# Altium PCB MCB3.PcbDoc
Units mil, origin at the board's own origin, x right, y up, seen from the top; angles counter-clockwise.
Board outline 1285 x 792.2 mil, 2 copper layers (Top Layer, Bottom Layer); 43 components, 55 nets, 215 pads, 39 vias.
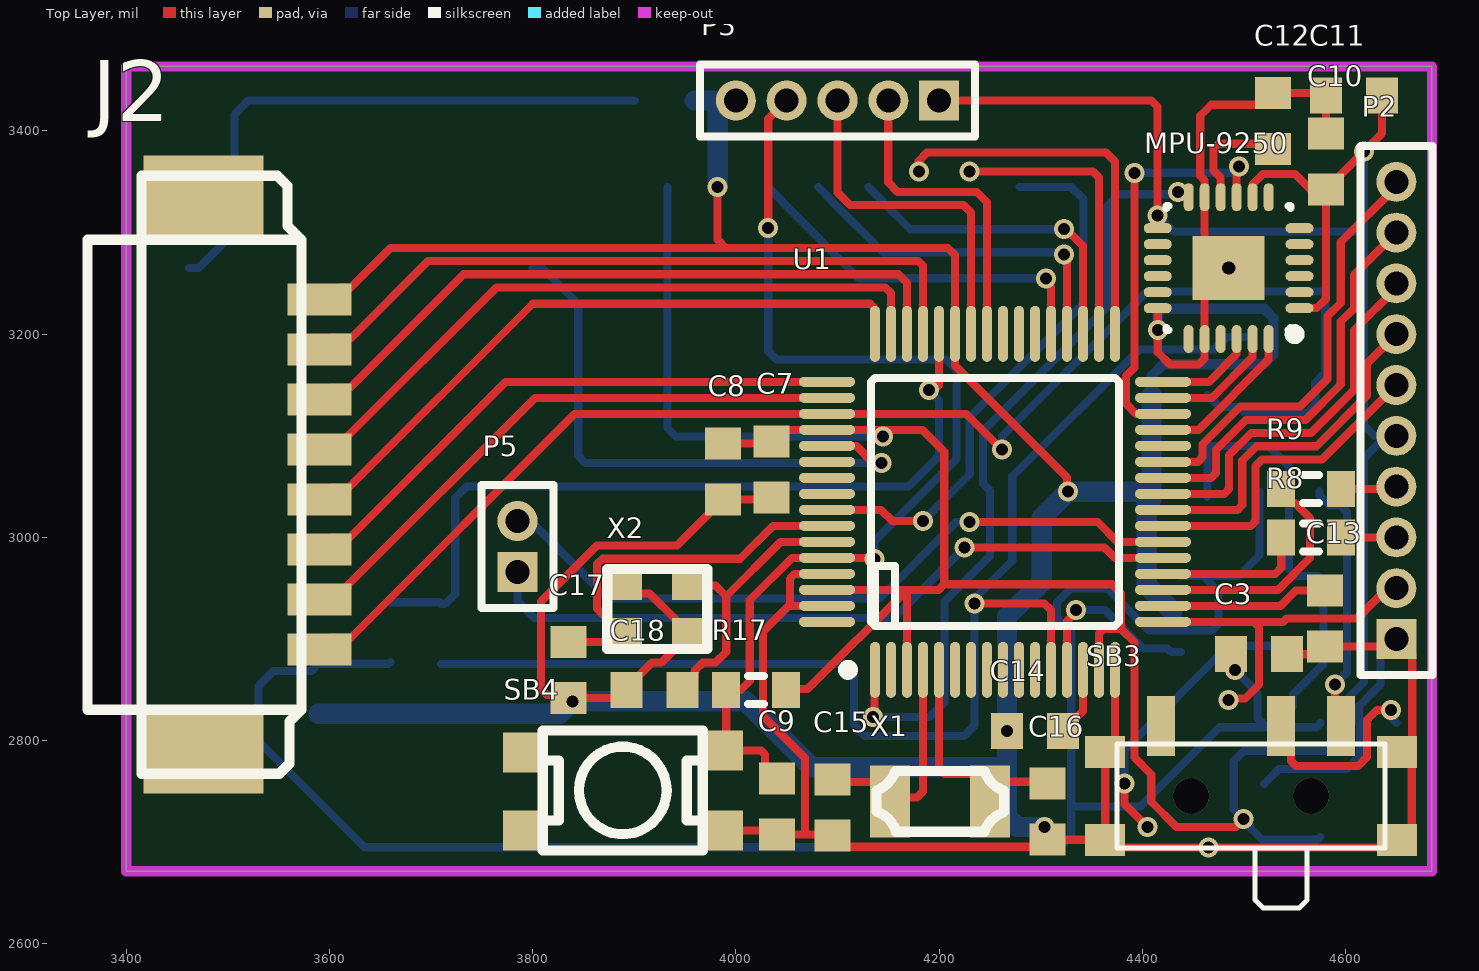
[diagram p0: Top Layer view]
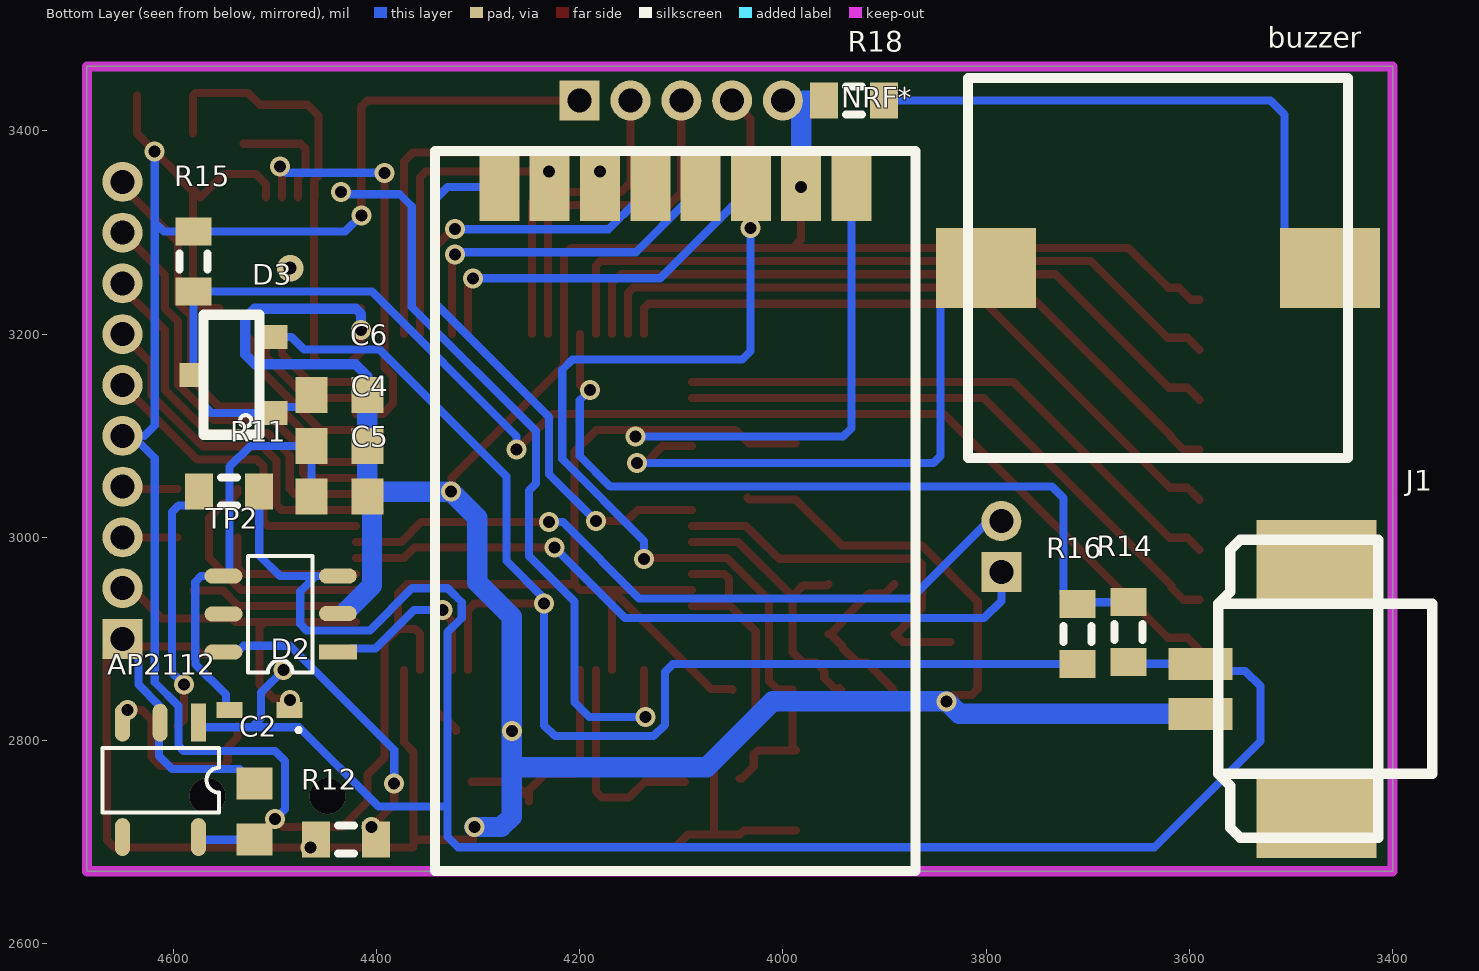
[diagram p1: Bottom Layer view, seen from below]

## Layer stack, top to bottom
Top Solder: solder mask 0.4, Solder Resist, Dk 3.5
Top Layer: signal copper 1.4
Dielectric 1: dielectric 12.6, FR-4, Dk 4.8
Bottom Layer: signal copper 1.4
Bottom Solder: solder mask 0.4, Solder Resist, Dk 3.5

## Board outline
3400,2671.38 3400,3463.58 4685,3463.58 4685,2671.38

## Design rules (kind name [scope] priority, off if disabled: settings)
Clearance [All] p1: gap=5 ignorepadtopadclearanceinfootprint=FALSE
PolygonConnect [All] p1: connectstyle=Relief reliefconductorwidth=10 reliefentries=4 polygonreliefangle="90 Angle" airgapwidth=10
RoutingVias [All] p1: holewidth=28 width=50 viastyle="Through Hole" minholewidth=11.81 minwidth=0 maxholewidth=40 maxwidth=50
SolderMaskExpansion [All] p1: expansion=4
Width [All] p1: maxlimit=40 minlimit=7 preferedwidth=10
30 further rules are at their usual default settings.

## Components (designator, comment, footprint, x,y, rotation, side; value= is the part's Value field where it differs from the comment)
AP2112 "AP2112" SOT-23-5 4555.12,2792.8 r270 bottom
buzzer "Buzzer" HN9650B-3 3816.14,3081.34 r90 bottom
C2 "Cap Semi" 1608[0603] 4520,2730 r270 bottom value=100pF
C3 "Cap Semi" 1608[0603] 4515,2885 r180 top value=100pF
C4 "Cap Semi" 1608[0603] 4436.59,3090 r0 bottom value=100pF
C5 "Cap Semi" 1608[0603] 4436.59,3040 r0 bottom value=100pF
C6 "Cap Semi" 1608[0603] 4436.59,3140 r0 bottom value=100pF
C7 "Cap Semi" 1608[0603] 4035,3066.61 r90 top value=100pF
C8 "Cap Semi" 1608[0603] 3987.44,3065 r90 top value=100pF
C9 "Cap Semi" 1608[0603] 4040.47,2735 r90 top value=100pF
C10 "Cap Semi" 1608[0603] 4580.76,3370 r270 top value=100pF
C11 "Cap Semi" 1608[0603] 4608.31,3435 r0 top value=100pF
C12 "Cap Semi" 1608[0603] 4528.46,3410 r270 top value=100pF
C13 "Cap Semi" 1608[0603] 4580,2920 r90 top value=100pF
C14 "Cap Semi" 1608[0603] 4294.37,2809.47 r0 top value=100pF
C15 "Cap Semi" 1608[0603] 4095,2734.33 r270 top value=100pF
C16 "Cap Semi" 1608[0603] 4306.57,2730 r270 top value=100pF
C17 "Cap Semi" 1608[0603] 3835,2869.29 r270 top value=100pF
C18 "Cap Semi" 1608[0603] 3920,2850 r180 top value=100pF
D2 "Schottky" SOD-523 4515,2830 r0 bottom
D3 "Vref" SOT-23 4580,3160 r90 bottom
J1 "Plug2" Terminal_block_2pin_1.25mm_SMD 3475,2850 r270 bottom
J2 "Plug8" Terminal_block_8pin_1.25mm_SMD 3475.83,2915.02 r90 top
MPU-9250 "24Pin" QFN_24PIN 4485,3265 r180 top
NRF* "NRF24L01" NRF24L01_Module_SMD 3869.54,2671.77 r0 bottom
P2 "MHDR1X10" MHDR1X10 4650,2900 r90 top
P3 "MHDR1X5" MHDR1X5 4200,3430 r180 top
P5 "MHDR1X2" MHDR1X2 3785,2966.06 r90 top
R8 "Res3" J1-0603 4566.22,3000 r0 top value=1K
R9 "Res3" J1-0603 4566.22,3047.56 r0 top value=1K
R11 "Res3" J1-0603 4545,3045 r0 bottom value=1K
R12 "Res3" J1-0603 4430,2702.44 r180 bottom value=1K
R14 "Res3" J1-0603 3660,2906.68 r270 bottom value=1K
R15 "Res3" J1-0603 4580,3271.46 r90 bottom value=1K
R16 "Res3" J1-0603 3710,2905 r90 bottom value=1K
R17 "Res3" J1-0603 4020,2850 r180 top value=1K
R18 "Res3" J1-0603 3930,3430 r180 bottom value=1K
SB3 "SPDT" SS-SK-02P 4505,2745 r0 top
SB4 "SPST" "TACK-SW_SMD 2P 4x3mm_2" 3967.44,2810 r270 top
TP2 "TP-4057" SOT-23-6 4462.91,2867.13 r0 bottom
U1 "NUC240SE3AE" MCU_LQFP_64_7x7 4255,3035 r90 top
X1 "Xtal" FC-135 4187.4,2673.07 r0 top value=32.768k
X2 "Xtal" 2520S 3890.04,2954.21 r0 top value=12M

## Footprints (in the part's own frame and the unit in brackets; to place one, negate y for a bottom-side part, rotate by r counter-clockwise, add the part's x,y. Pads: shape width x height; smd on the part's side, far side on the other; paste and mask are expansions set on the pad)
1608[0603] [mm] "Chip Capacitor, Body 1.6x0.8mm, IPC High Density"
  rect 0.8x0.9 smd: 1(-0.7,0) 2(0.7,0)
  body extent -0.87,-0.48 0.87,0.48, height 1.3
2520S [mm]
  rect 0.9x0.8 smd: 1(0,-1.25) 2(1.65,0) ""(0,0) ""(1.65,-1.25)
  silkscreen extent -0.43,-1.63 2.07,0.37
FC-135 [mm]
  rect 1x1.8 smd: 1(-0.91,1.7) 2(1.59,1.7)
  silkscreen extent -1.24,0.94 1.94,2.46
HN9650B-3 [mm]
  rect 2x2.5 smd: 1(4.665,-0.41) 2(4.665,-9.005)
  silkscreen extent -0.08,-9.46 9.42,0.04
J1-0603 [mm] "Chip Resistor, Body 1.6x0.8mm, IPC High Density"
  rect 0.7x0.9 smd: 1(-0.75,0) 2(0.75,0)
  silkscreen extent -0.2,-0.35 0.2,0.35, body extent -0.85,-0.48 0.85,0.48, height 0.9
MCU_LQFP_64_7x7 [mm]
  oval 1.4x0.25 smd: 1(-4.2,3) 2(-4.2,2.6) 3(-4.2,2.2) 4(-4.2,1.8) 5(-4.2,1.4) 6(-4.2,1) 7(-4.2,0.6) 8(-4.2,0.2) 9(-4.2,-0.2) 10(-4.2,-0.6) 11(-4.2,-1) 12(-4.2,-1.4) 13(-4.2,-1.8) 14(-4.2,-2.2) 15(-4.2,-2.6) 16(-4.2,-3) 33(4.2,-3) 34(4.2,-2.6) 35(4.2,-2.2) 36(4.2,-1.8) 37(4.2,-1.4) 38(4.2,-1) 39(4.2,-0.6) 40(4.2,-0.2) 41(4.2,0.2) 42(4.2,0.6) 43(4.2,1) 44(4.2,1.4) 45(4.2,1.8) 46(4.2,2.2) 47(4.2,2.6) 48(4.2,3)
  oval 0.25x1.4 smd: 17(-3,-4.2) 18(-2.6,-4.2) 19(-2.2,-4.2) 20(-1.8,-4.2) 21(-1.4,-4.2) 22(-1,-4.2) 23(-0.6,-4.2) 24(-0.2,-4.2) 25(0.2,-4.2) 26(0.6,-4.2) 27(1,-4.2) 28(1.4,-4.2) 29(1.8,-4.2) 30(2.2,-4.2) 31(2.6,-4.2) 32(3,-4.2) 49(3,4.2) 50(2.6,4.2) 51(2.2,4.2) 52(1.8,4.2) 53(1.4,4.2) 54(1,4.2) 55(0.6,4.2) 56(0.2,4.2) 57(-0.2,4.2) 58(-0.6,4.2) 59(-1,4.2) 60(-1.4,4.2) 61(-1.8,4.2) 62(-2.2,4.2) 63(-2.6,4.2) 64(-3,4.2)
  silkscreen extent -4.32,-3.1 3.1,3.8, body extent -3.5,-3.5 3.5,3.5, height 1.6
MHDR1X2 [mm] "Connector; Header; 2 Position"
  rect 1x1 hole 0.6: 1(0,0)
  round 1 hole 0.6: 2(1.27,0)
  silkscreen extent -0.9,-0.9 2.17,0.9
MHDR1X5 [mm] "Connector; Header; 5 Position"
  rect 1x1 hole 0.6: 1(0,0)
  round 1 hole 0.6: 2(1.27,0) 3(2.54,0) 4(3.81,0) 5(5.08,0)
  silkscreen extent -0.9,-0.9 5.98,0.9
MHDR1X10 [mm] "Connector; Header; 10 Position"
  rect 1x1 hole 0.6: 1(0,0)
  round 1 hole 0.6: 2(1.27,0) 3(2.54,0) 4(3.81,0) 5(5.08,0) 6(6.35,0) 7(7.62,0) 8(8.89,0) 9(10.16,0) 10(11.43,0)
  silkscreen extent -0.9,-0.9 12.33,0.9
NRF24L01_Module_SMD [mm]
  rect 1x1.7 smd: 1(1.6,-17.1) 2(2.857,-17.1) 3(4.114,-17.1) 4(5.371,-17.1) 5(6.629,-17.1) 6(7.886,-17.1) 7(9.143,-17.1) 8(10.4,-17.1)
  silkscreen extent 0,-18 12.02,0
QFN_24PIN [mm]
  oval 0.7x0.249 smd: 1(-1.772,1) 2(-1.772,0.6) 3(-1.772,0.2) 4(-1.772,-0.2) 5(-1.772,-0.6) 6(-1.772,-1) 13(1.772,-1) 14(1.772,-0.6) 15(1.772,-0.2) 16(1.772,0.2) 17(1.772,0.6) 18(1.772,1)
  oval 0.249x0.7 smd: 7(-1,-1.772) 8(-0.6,-1.772) 9(-0.2,-1.772) 10(0.2,-1.772) 11(0.6,-1.772) 12(1,-1.772) 19(1,1.772) 20(0.6,1.772) 21(0.2,1.772) 22(-0.2,1.772) 23(-0.6,1.772) 24(-1,1.772)
  rect 1.8x1.6 smd: 25(0,0)
  silkscreen extent -1.77,-1.55 1.55,1.78, body extent -1.55,-1.55 1.55,1.55, height 1
SOD-523 [mm] "SODFL, 2-Leads, Body 0.80x1.60mm, IPC Medium Density"
  rect 0.65x0.4 smd: 1(-0.75,0) 2(0.75,0)
  silkscreen extent -1.02,0.45 -0.93,0.55, body extent -0.65,-0.45 0.65,0.45, height 0.65
SOT-23 [mm]
  rect 0.6x0.7 smd: 1(-0.95,-2) 2(0,0) 3(0.95,-2)
  silkscreen extent -1.5,-1.65 1.5,-0.25
SOT-23-5 [mm]
  rect 0.95x0.38 smd: 1(-0.63,-0.51)
  oval 0.95x0.38 smd: 2(-0.63,-1.47) 3(-0.63,-2.41) 4(2.23,-2.41) 5(2.23,-0.51)
  silkscreen extent 0,-2.91 1.61,0
SOT-23-6 [mm]
  rect 0.95x0.38 smd: 1(-0.63,-0.51)
  oval 0.95x0.38 smd: 2(-0.63,-1.47) 3(-0.63,-2.41) 4(2.23,-2.41) 5(2.227,-1.461) 6(2.23,-0.51)
  silkscreen extent 0,-2.91 1.61,0
SS-SK-02P [mm]
  rect 0.7x1.5 smd: 1(-2.195,1.76) 2(0.805,1.76) 3(2.305,1.76)
  rect 1x0.8 smd: ""(-3.595,-1.09) ""(-3.595,1.11) ""(3.705,-1.09) ""(3.705,1.11)
  silkscreen extent -3.29,-2.79 3.41,1.31
"TACK-SW_SMD 2P 4x3mm_2" [mm]
  rect 1x1 smd: 1(0.5,0.5) 1(0.55,-4.5) 2(2.5,0.5) 2(2.5,-4.5)
  silkscreen extent 0,-4 3,0
Terminal_block_2pin_1.25mm_SMD [mm]
  rect 0.8x1.6 smd: 1(-0.65,-2.9) 2(0.6,-2.9)
  rect 2.1x3 smd: ""(-3.2,0) ""(3.15,0)
  silkscreen extent -3.75,-2.45 3.7,2.9
Terminal_block_8pin_1.25mm_SMD [mm]
  rect 0.8x1.6 smd: 1(-0.65,-2.9) 2(0.6,-2.9) 3(1.85,-2.9) 4(3.1,-2.9) 5(4.35,-2.9) 6(5.6,-2.9) 7(6.85,-2.9) 8(8.1,-2.9)
  rect 2.1x3 smd: ""(-3.2,0) ""(10.65,0)
  silkscreen extent -3.75,-2.45 11.2,2.9

## Part data
C2 C3 C4 C5 C6 C7 C8 C9 C10 C11 C12 C13 C14 C15 C16 C17 C18: "Capacitor (Semiconductor SIM Model)", LatestRevisionDate=29-May-2009, LatestRevisionNote="IPC-7351 Footprint Added.", PackageDescription="Chip Capacitor", PackageReference=C1206, Published=8-Jun-2000, Publisher="Altium Limited"
D2: library part Diode2
MPU-9250: library part MPU-9250_2
NRF*: library part NRF24L01_module
P2: "Header, 10-Pin", LatestRevisionDate=17-Jul-2002, LatestRevisionNote="Re-released for DXP Platform.", Publisher="Altium Limited"
P3: "Header, 5-Pin", LatestRevisionDate=17-Jul-2002, LatestRevisionNote="Re-released for DXP Platform.", Publisher="Altium Limited"
P5: "Header, 2-Pin", LatestRevisionDate=17-Jul-2002, LatestRevisionNote="Re-released for DXP Platform.", Publisher="Altium Limited"
R8 R9 R11 R12 R14 R15 R16 R17 R18: "Resistor", LatestRevisionDate=29-May-2009, LatestRevisionNote="IPC-7351 Footprint Added.", PackageDescription="Chip Resistor", PackageReference=J1-0603, Published=8-Jun-2000, Publisher="Altium Limited"
SB3: library part Switch_Button2
SB4: library part Switch_Button1
U1: OriginalSymbolOrigin=(0,0)

## Via types
v1: diameter 19.68, hole 11.81, Top Layer to Bottom Layer, tented both sides, 36 vias
v2: diameter 35.43, hole 35.43, Top Layer to Bottom Layer, 2 vias
v3: diameter 25.98, hole 12.99, Top Layer to Bottom Layer, tented top, 1 vias

## Nets (pads, with @x,y where several pads share a name; then routed paths per layer and width w, separated by ;. In a path a pad name is that pad's centre, name@x,y a point inside that pad or via, vN(x,y) a via of type N, cw(c..) or ccw(c..) an arc to the next point about the centre after c; other vN are vias at no path point)
ADC0: R14.1 R16.2 U1.44 | length 787.6
  Top Layer w8: v1(4190,3145) 4194.76,3145 4199.88,3150.12 U1.44
  Bottom Layer w8: R14.1 3708.32,2936.21 R16.2 3713.94,2934.53 3723.72,2944.31 3723.72,3038.72 3735,3050 4170,3050 4200,3080 4200,3135 v1(4190,3145)
ADC1: J2.7 U1.45 | length 699.2
  Top Layer w8: J2.7 3601.75,3196.46 3621.46,3196.46 3697,3272 4179.45,3272 4184.13,3267.31 U1.45
ADC2: J2.6 U1.46 | length 683.3
  Top Layer w8: J2.6 3601.75,3147.24 3619.99,3147.24 3731.75,3259 4160,3259 4168.39,3250.61 U1.46
ADC3: J2.5 U1.47 | length 671.8
  Top Layer w8: J2.5 3605.75,3086.28 3617.5,3098.03 3617.5,3099.11 3764.39,3246 4147,3246 4152.64,3240.36 U1.47
ADC4: J2.4 U1.48 | length 653.7
  Top Layer w8: J2.4 3601.75,3048.82 3618.82,3048.82 3800,3230 4132.2,3230 4136.54,3225.67 4136.54,3200.71 U1.48
ADC5: J2.3 U1.49 | length 568.1
  Top Layer w8: J2.3 3601.75,2999.61 3619.61,2999.61 3773.11,3153.11 U1.49
ADC6: J2.2 U1.50 | length 583.2
  Top Layer w8: J2.2 3605.75,2938.65 3617.5,2950.39 3617.5,2952.5 3802.36,3137.36 U1.50
ADC_ONOFF: D3.3 R16.1 U1.12 | length 1272.5
  Top Layer w8: v1(4235,2935) 4303.5,2935 4310.12,2928.39 U1.12
  Bottom Layer w8: R16.1 4108.37,2875.47 4116.16,2867.68 4116.16,2815.38 4127.2,2804.34 4224.34,2804.34 4235,2815 v1(4235,2935) 4235,2940 4272,2977 4272,3059.85 4397.21,3185.07 4471.21,3185.07 4483.55,3197.4 D3.3
AVDD: AP2112.5 C2.2 C7.2 C8.2 C10.2 C11.2 MPU-9250.1 MPU-9250.8 MPU-9250.13 NRF*.1 P2.5 P3.1 R15.2 R17.1 U1.3 U1.15 U1.52 U1.62 | length 3521.9
  Top Layer w8: C8.2@3994.09,3099.2 C8.2 4033.39,3092.56 C7.2 4046.69,3105.87 U1.52 4183.5,3105.87 4205,3084.37 4205,2953.84 ; R17.1 4050.15,2850.62 4070.62,2850.62 4168.39,2948.39 ; U1.62 4168.39,2948.39 ; U1.3 4168.39,2948.39 ; P3.1 4408.84,3430 4415,3423.84 v1(4415,3316.87) ; U1.15 4357.36,2905.31 4362.05,2910 4378.91,2910 ; v1(4499.78,2722.66) 4492.13,2715 4433.68,2715 4408.84,2739.83 4408.84,2766.51 4392.15,2783.2 4392.15,2896.76 4378.91,2910 ; MPU-9250.8 4508.62,3347.57 4518.61,3357.56 4550.32,3357.56 4573.1,3334.78 C10.2 ; MPU-9250.1 4571.71,3225.63 4580.76,3234.68 C10.2 ; C11.2 4635.87,3397.56 v1(4618.32,3380) 4594.47,3356.16 4594.47,3354.19 4582.72,3342.44 C10.2 ; 4168.39,2948.39 4199.54,2948.39 4205,2953.84 ; 4205,2953.84 4370.07,2953.84 4378.91,2945 4378.91,2910
  Bottom Layer w8: NRF*.1 3932.53,3107.47 3940.8,3099.2 v1(4145,3099.2) ; v1(4415,3316.87) 4430.88,3300.98 R15.2 4609.3,3300.98 4618.32,3310 ; AP2112.5 4572.64,2702.44 C2.2 4518.03,2702.44 4506.28,2714.19 4506.28,2716.16 v1(4499.78,2722.66) 4490,2732.44 4490,2780 4499.9,2789.9 4589.9,2789.9 4595,2795 4595,2834.13 4618.32,2857.45 4618.32,3078.32 P2.5@4640,3100 ; v1(4618.32,3380) 4618.32,3310 ; P2.5 P2.5@4640,3100 ; 4618.32,3310 4618.32,3110 4628.32,3100 P2.5@4640,3100
button: P2.10 U1.27 | length 425.3
  Top Layer w8: U1.27 4454.69,3074.37 4459.38,3079.06 4459.38,3091.67 4496.43,3128.72 4555.18,3128.72 4582.31,3155.85 4582.31,3217.85 4595.31,3230.85 4595.31,3290.87 4650,3345.55 P2.10
buzzer: buzzer.1 U1.53 | length 570.9
  Top Layer w8: U1.53 4090,3089.77 4118.59,3089.77 4134.97,3073.38 v1(4143.38,3073.38)
  Bottom Layer w8: buzzer.1 3809.41,3265 3844.78,3229.63 3844.78,3080.22 3851.62,3073.38 v1(4143.38,3073.38)
CHRG: TP2.1 U1.13 | length 182.7
  Top Layer w8: U1.13 4325.87,2917.86 4334.95,2926.94 v1(4334.95,2928.39)
  Bottom Layer w8: v1(4334.95,2928.39) 4363.23,2928.39 4400.93,2890.68 4424.53,2890.68 4428.01,2887.2 TP2.1
D12I: C18.1 U1.59 X2.2 | length 281.4
  Top Layer w8: C18.1@3942.56,2849.88 C18.1@3944.21,2851.54 ; C18.1 3959.31,2861.75 3959.31,2867.71 3960,2868.4 3960,2869.29 3967.42,2876.72 3980,2876.72 3990.47,2887.19 3990.47,2942.09 ; X2.2 3956.68,2952.53 3980.03,2952.53 3990.47,2942.09 ; U1.59 4044.02,2995.63 3990.47,2942.09
D12O: C17.1 U1.58 X2.1 | length 381.3
  Top Layer w8: C17.1 3881.89,2896.85 X2.1 3888.07,2905 3863.32,2929.75 3863.32,2973.69 3868.59,2978.96 4003.96,2978.96 4036.38,3011.38 U1.58
D+: R8.1 U1.20 | length 148.8
  Top Layer w8: U1.20 4530.83,2964.13 4536.69,2970 R8.1
D-: R9.1 U1.19 | length 239.4
  Top Layer w8: U1.19 4533.46,2948.39 4565,2979.92 4565,3019.25 4550.41,3033.84 4546.47,3033.84 4536.69,3043.62 R9.1
DVBUS: D2.1 P2.2 U1.17 | length 343.5
  Top Layer w8: U1.17 4510,2916.89 ; v1(4485,2840) 4486.35,2841.35 4501.35,2841.35 4515,2855 4515,2911.89 4510,2916.89 ; P2.2 4641.31,2950 4611.31,2920 4541.85,2920 4538.74,2916.89 4510,2916.89
GND: AP2112.2 C2.1 C3.1 C4.1 C5.1 C6.1 C7.1 C8.1 C9.1 C10.1 C11.1 C12.1 C13.1 C14.1 C15.2 C16.2 C17.2 C18.2 J1.2 J2.8 MPU-9250.11 MPU-9250.18 MPU-9250.20 MPU-9250.25 NRF*.2 P2.1 P3.5 R12.1 R18.1 SB3. SB4.2@3987.13,2711.57 TP2.2 U1.16 U1.43 U1.61 U1.63 X2. | length 5734.3
  Top Layer w8: J2.8 3598.25,3233.92 3610,3245.67 3620.67,3245.67 3660,3285 3990.03,3285 ; C17.2@3831.73,2845 3814.16,2845 3808.28,2850.87 3808.28,2937.03 3863.21,2991.96 3941.96,2991.96 C8.1 4033.39,3037.44 C7.1 ; C17.2 3884.18,2841.73 C18.2 3892.44,2851.69 3917.47,2876.72 3926.72,2876.72 3941.28,2891.28 3941.28,2893.25 X2.@3953.03,2905 ; X2.@3890.04,2954.21 3899.32,2944.93 3915.07,2944.93 3941.28,2918.72 3941.28,2916.75 X2.@3953.03,2905 ; X2.@3955,2905 X2.@3953.03,2905 ; v1(3982.02,3345) 3982.02,3293.01 3990.03,3285 ; SB4.2@3987.13,2711.57 4038.31,2711.57 4042.44,2707.44 4067.99,2707.44 ; U1.63 4051.87,2932.64 ; U1.61 4057.77,2964.13 4053.09,2959.45 4053.09,2933.86 4051.87,2932.64 ; v1(4326.67,3045) 4325.89,3045.78 4325.89,3059.11 4215.63,3169.37 U1.43 4215.63,3277.84 4208.47,3285 3990.03,3285 ; U1.16 4373.11,2798.35 4363.46,2788.7 4363.46,2702.8 SB3.@4363.11,2702.44 ; MPU-9250.18 v1(4415.22,3203.91) 4415.22,3182.18 4427.4,3170 4455.31,3170 4461.38,3176.06 MPU-9250.20 MPU-9250.11 4461.29,3334.87 4461.29,3351.48 4457,3355.77 4457,3415 4467.81,3425.81 4514.75,3425.81 4526.5,3437.56 C12.1 4578.2,3437.56 C11.1 C10.1 ; C3.1 4572.56,2885 C13.1 4642.44,2892.44 P2.1 4665.69,2884.31 4665.69,2799.58 4665.2,2799.1 4665.2,2702.09 4658.02,2694.92 4364.1,2694.92 4363.37,2700.44 4363.16,2702.05 SB3.@4363.11,2702.44 ; 4051.87,2932.64 4026.67,2907.44 4026.67,2824.3 4067.99,2782.98 4067.99,2707.44 ; 4067.99,2707.44 4093.54,2707.44 4105.42,2695.57 4305.32,2695.57 4305.32,2703.7 C16.2 SB3.@4363.11,2702.44
  Bottom Layer w8: C5.1@4397.28,3026.28 C5.1@4404.41,3033.41 ; C2.1 4534.55,2772.11 4601.29,2772.11 4614.18,2785 4614.18,2816.41 AP2112.2 4612.99,2833.74 4634.31,2855.06 4634.31,2884.31 P2.1
  Bottom Layer w10: C6.1 4409.03,3158.81 4420.61,3170.39 4519.57,3170.39 4529.19,3180.01 4529.19,3215.81 4520,3225 4420.22,3225 4415.22,3220 v1(4415.22,3203.91)
  Bottom Layer w20: J1.2 3826.64,2826.38 v1(3838.94,2838.68) 4009.93,2838.68 4074.85,2773.75 4266.81,2773.75 ; R18.1 3979.76,3430 3982.02,3427.74 v1(3982.02,3345) ; v1(4303.65,2715) 4277,2715 4266.81,2725.19 4266.81,2773.75 ; C5.1@4404.41,3033.41 4404.41,2952.7 4417.58,2939.53 4417.69,2939.53 4429.41,2927.81 TP2.2@4429.41,2927.52 ; C5.1@4409.03,3038.03 C5.1 ; C6.1 C4.1 C5.1 ; 4266.81,2773.75 v1(4266.81,2809.47) 4266.81,2921.81 4300.93,2955.93 4300.93,3019.26 v1(4326.67,3045) 4404.03,3045 C5.1
  other v1: 4465,2695
ICE_CLK: P3.3 U1.42 | length 349.6
  Top Layer w8: P3.3 4100,3339.32 4112.32,3327 4224.18,3327 4231.38,3319.8 U1.42
ICE_DAT: P3.2 U1.41 | length 315.5
  Top Layer w8: P3.2 4150,3349.15 4159.15,3340 4237,3340 4247.13,3329.87 U1.41
LED1: P2.6 U1.23 | length 318.7
  Top Layer w8: U1.23 4506.69,3011.38 4511.38,3016.06 4511.38,3070.13 4517.97,3076.72 4576.72,3076.72 P2.6
LED2: P2.7 U1.24 | length 345.4
  Top Layer w8: U1.24 4493.69,3027.13 4498.38,3031.81 4498.38,3075.51 4512.58,3089.72 4571.33,3089.72 4621.31,3139.7 4621.31,3171.31 P2.7
LED3: P2.8 U1.25 | length 372
  Top Layer w8: U1.25 4480.69,3042.87 4485.38,3047.56 4485.38,3080.9 4507.2,3102.72 4565.95,3102.72 4608.31,3145.08 4608.31,3203.87 4650,3245.55 P2.8
LED4: P2.9 U1.26 | length 398.6
  Top Layer w8: U1.26 4467.69,3058.62 4472.38,3063.31 4472.38,3086.28 4501.81,3115.72 4560.56,3115.72 4595.31,3150.47 4595.31,3212.47 4608.31,3225.47 4608.31,3258.31 P2.9
MPU_INT: MPU-9250.12 U1.1 | length 759.1
  Top Layer w8: v1(4135,2823.18) 4136.54,2824.72 4136.54,2869.29 U1.1
  Bottom Layer w8: v1(4135,2823.18) 4190.62,2823.18 4205.17,2837.73 4205.17,2936.82 4250,2981.65 4250,3046.12 4243.19,3052.93 4243.19,3104.81 4365.3,3226.91 4365.3,3325.94 4377.12,3337.76 4432.76,3337.76 v1(4435,3340)
NetAP2112_3: AP2112.3 SB3.2 | length 197.8
  Top Layer w8: SB3.2 4536.69,2802.98 4546.47,2793.2 4546.47,2779.8 4551.28,2775 4612.49,2775 4621.31,2783.82 4621.31,2820.47 4630.85,2830 v1(4645,2830)
  Bottom Layer w8: v1(4645,2830) 4645,2822.6 AP2112.3
Netbuzzer_2: buzzer.2 R18.2 | length 575.2
  Bottom Layer w8: buzzer.2 3471.03,3265 3506.4,3300.37 3506.4,3416.4 3520,3430 R18.2
NetC12_2: C12.2 MPU-9250.10 | length 113.6
  Top Layer w8: MPU-9250.10 4477.13,3354.03 4470,3361.16 4470,3382.62 4474.82,3387.44 C12.2@4530.83,3387.44
NetC13_2: C13.2 U1.18 | length 165.8
  Top Layer w8: U1.18 4536.1,2932.64 4551.02,2947.56 C13.2
NetC14_2: C14.2 U1.14 | length 69.5
  Top Layer w8: C14.2 4321.93,2811.43 4333.68,2823.18 4335.65,2823.18 4341.61,2829.15 U1.14
NetP2_3: P2.3 R8.2 | length 54.3
  Top Layer w8: R8.2 P2.3
NetP2_4: P2.4 R9.2 | length 55.3
  Top Layer w8: R9.2 4647.56,3047.56 P2.4
NetR11_2: R11.2 SB3.3 | length 255.4
  Top Layer w8: v1(4589.61,2855.39) 4589.61,2820.43 SB3.3
  Bottom Layer w8: R11.2 4574.53,3041.06 4584.31,3031.28 4595,3031.28 4601.29,3024.99 4601.29,2867.07 v1(4589.61,2855.39)
NetR12_2: R12.2 TP2.6 | length 298.3
  Top Layer w8: v1(4382.56,2757.56) 4382.56,2737.44 v1(4405,2715)
  Bottom Layer w8: v1(4382.56,2757.56) 4382.56,2790.91 4485,2893.35 4530.84,2893.35 4536.98,2887.2 TP2.6
NRF_CE: NRF*.3 U1.37 | length 367.9
  Top Layer w8: v1(4305,3255) 4305,3251.84 4310.12,3246.72 U1.37
  Bottom Layer w8: NRF*.3 4045.24,3331.28 4045.24,3330.65 4120.88,3255 v1(4305,3255)
NRF_IRQ: NRF*.8 U1.57 | length 549.4
  Top Layer w8: U1.57 4142.87,3027.13 4153.94,3016.06 v1(4184.13,3016.06)
  Bottom Layer w8: v1(4184.13,3016.06) 4230.19,3062.12 4230.19,3118.38 4342,3230.19 4342,3333 4330,3345 NRF*.8
RESET: C9.2 P3.4 R17.2 SB4.1@3987.13,2790.32 U1.60 | length 1048.6
  Top Layer w8: v1(4031.77,3304.37) 4031.77,3411.77 P3.4 ; C9.2@4042.44,2762.56 C9.2 4028.72,2774.31 4028.72,2786.25 4024.66,2790.32 3987.13,2790.32 3990.47,2793.66 R17.2 4005,2850 4013.67,2858.67 4013.67,2938.42 4055.14,2979.88 U1.60 4135.62,2979.88 v1(4136.54,2978.96)
  Bottom Layer w8: v1(4031.77,3304.37) 4031.77,3183.23 4040,3175 4207.19,3175 4217.19,3165 4217.19,3077.19 4136.54,2996.54 v1(4136.54,2978.96)
SPI0_CLK: MPU-9250.23 U1.31 | length 122.5
  Top Layer w8: U1.31 4468.3,3137.36 4508.62,3177.68 MPU-9250.23
SPI0_CSN: MPU-9250.22 U1.32 | length 98.7
  Top Layer w8: U1.32 4465.67,3153.11 4492.87,3180.32 MPU-9250.22
SPI0_MISO: MPU-9250.9 U1.30 | length 398.4
  Top Layer w8: v1(4392.15,3358.84) 4392.15,3167.23 4383.8,3158.88 4383.8,3131.6 4393.78,3121.61 U1.30 ; MPU-9250.9 v1@4492.87,3356.33
  Bottom Layer w8: v1(4392.15,3358.84) 4488.84,3358.84 v1(4495,3365)
SPI0_MOSI: MPU-9250.24 U1.29 | length 152.8
  Top Layer w8: U1.29 4455.19,3105.87 4524.37,3175.05 MPU-9250.24
SPI1_CLK: NRF*.5 U1.35 | length 322.8
  Top Layer w8: v1(4322.81,3303.32) 4323.86,3304.37 4341.61,3286.62 U1.35
  Bottom Layer w8: NRF*.5 4144.22,3331.28 4144.22,3330.65 4171.55,3303.32 v1(4322.81,3303.32)
SPI1_CSN: NRF*.4 U1.36 | length 349.2
  Top Layer w8: v1(4322.77,3278.63) 4322.77,3275.47 4325.87,3272.37 U1.36
  Bottom Layer w8: NRF*.4 4094.73,3331.28 4094.73,3330.65 4144.69,3280.69 4320.72,3280.69 v1(4322.77,3278.63)
SPI1_MISO: NRF*.7 U1.34 | length 283.6
  Top Layer w8: v1(4230,3360) 4351.48,3360 4357.36,3354.12 U1.34
SPI1_MOSI: NRF*.6 U1.33 | length 380.5
  Top Layer w8: v1(4180,3360) 4180,3370.63 4188.21,3378.84 4364.27,3378.84 4373.11,3370 U1.33
STDBY: TP2.5
UART_0_RX: P5.1 U1.21 | length 716.8
  Top Layer w8: v1(4225,2990) 4362.77,2990 4370.14,2982.63 4370.3,2982.63 4373.04,2979.88 U1.21
  Bottom Layer w8: P5.1@3785,2978.96 P5.1 3785,2937.52 3801.94,2920.58 4155.58,2920.58 v1(4225,2990)
UART_0_TX: P5.2 U1.22 | length 711.3
  Top Layer w8: v1(4230,3015) 4356.16,3015 4375.53,2995.63 U1.22
  Bottom Layer w8: P5.2@3785,3028.96 3873.96,2940 4141.62,2940 4216.62,3015 v1(4230,3015)
UART_1_RX: U1.10
UART_1_TX: U1.11
V_BAT: AP2112.1 C3.2 J1.1 R11.1 R14.2 TP2.3 | length 2013.9
  Bottom Layer w8: R14.2 3658.43,2875.59 J1.1 3582.21,2868.62 3545,2868.62 3530,2853.62 3530,2799.31 3634.31,2695 4319.7,2695 4330,2705.3 4330,2735 ; TP2.3 4460,2962.01 ; v1(4491.35,2869.65) 4513.54,2847.45 4513.54,2822.18 4522.59,2813.13 ; R11.1 4515.47,2982.44 4495.04,2962.01 4460,2962.01 ; AP2112.1 4575.2,2816.61 4571.72,2813.13 4522.59,2813.13 ; 4330,2735 4330,2906.68 4316.1,2920.58 4316.1,2936.19 4327.14,2947.23 4327.23,2947.23 4330,2950 4365,2950 4406.48,2908.52 4468.83,2908.52 4475,2914.69 4475,2947.01 4460,2962.01 ; 4330,2735 4398.02,2735 4476.15,2813.13 4522.59,2813.13
V_USB: C4.2 C5.2 D2.2 TP2.4 | length 409.3
  Bottom Layer w8: C5.2 C4.2 4524.18,3090 4544.53,3069.65 TP2.4@4544.53,2968.85 ; D2.2 4548.22,2833.69 4548.22,2845.19 4578.03,2875 4578.03,2880 4578.41,2880.38 4578.41,2956.24 4572.64,2962.01 TP2.4@4551.37,2962.01
Vref: C6.2 D3.1 D3.2 J2.1 R15.1 U1.51 | length 1406.4
  Top Layer w8: J2.1 3601.75,2901.18 3620.87,2901.18 3841.3,3121.61 U1.51 4226.7,3121.61 v1(4262.03,3086.28)
  Bottom Layer w8: v1(4262.03,3086.28) 4262.03,3099.51 4404.45,3241.93 R15.1 D3.2 4578.03,3160 4570.22,3152.19 4570.22,3130.22 4562.6,3122.6 D3.1 4495.65,3128.21 4475.9,3128.21 C6.2
X32I: C16.1 U1.5 X1.2 | length 230.6
  Top Layer w8: U1.5 4199.88,2772.12 4205,2767 4234.31,2767 4250,2751.31 X1.2@4250,2743.84 ; X1.2 X1.2@4250,2743.84 ; C16.1@4306.57,2759.53 4265.69,2759.53 X1.2@4250,2743.84
X32O: C15.1 U1.4 X1.1 | length 216.3
  Top Layer w8: C15.1@4096.57,2759.53 4135.89,2759.53 4151.57,2743.84 4178.09,2743.84 4184.13,2749.88 U1.4
pads on no net: AP2112.4 J1. J2. MPU-9250.2 MPU-9250.3 MPU-9250.4 MPU-9250.5 MPU-9250.6 MPU-9250.7 MPU-9250.14 MPU-9250.15 MPU-9250.16 MPU-9250.17 MPU-9250.19 MPU-9250.21 SB3.1 SB4.1@3790.28,2788.35 SB4.2@3790.28,2711.57 U1.2 U1.6 U1.7 U1.8 U1.9 U1.28 U1.38 U1.39 U1.40 U1.54 U1.55 U1.56 U1.64
copper on no net:
  other v2: 4448.11,2745.39 4566.22,2745.39
  other v3: 4485,3265

## Keep-outs
Keep-Out Layer:
  the board outline again, w10